# EAGLE board Dash LEDs r3 (EAGLE 8.4.1)
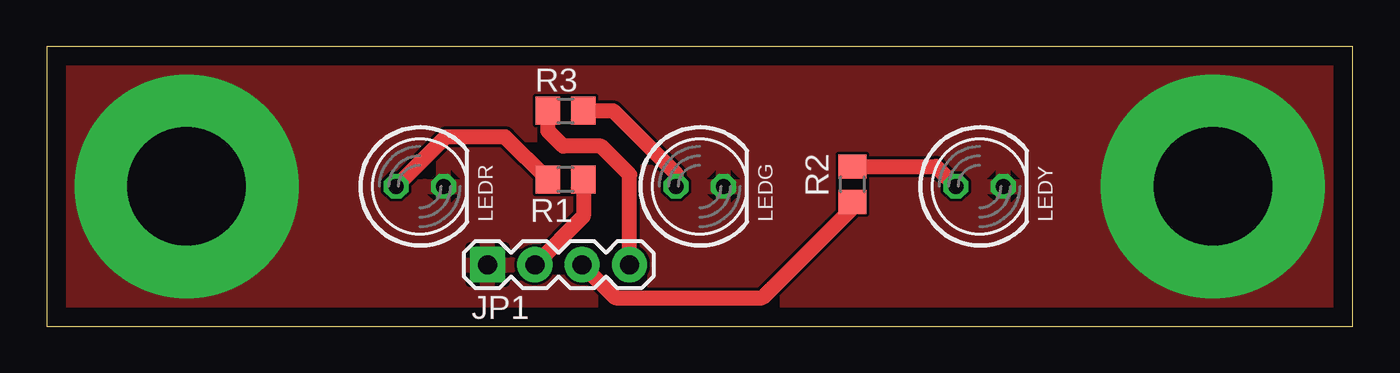
[diagram p0: board, top side]
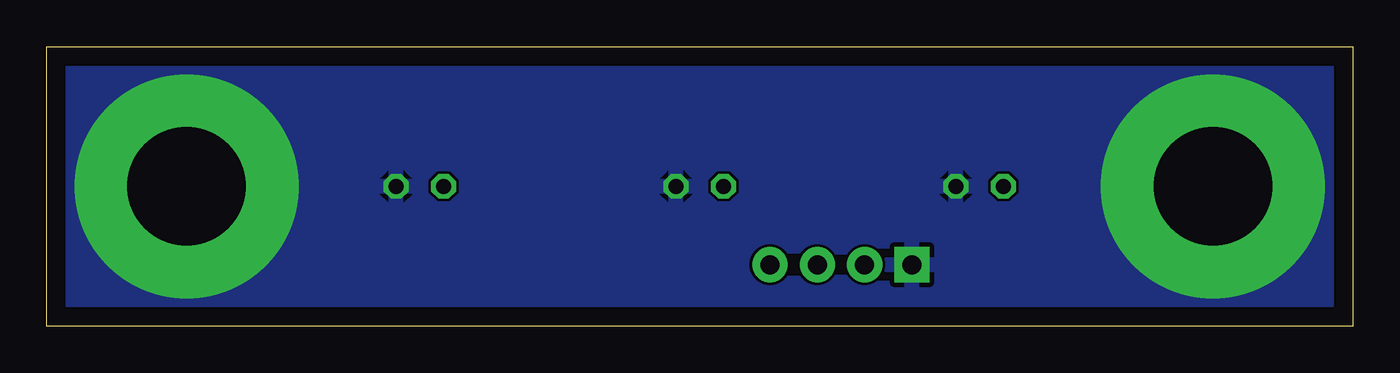
[diagram p1: board, bottom side, seen from below]

Size 70 x 15 mm. Coordinates in mm from the lower left corner, seen from the top.
Outline: 0,0 70,0 70,15 0,15 0,0
Copper layers (1*16): Top 0.035mm / dielectric 1.5mm / Bottom 0.035mm
Design rules "default": minimum track width 6mil, minimum drill 0.35mm, track to track 6mil, track to pad 6mil, pad to pad 6mil, via to via 6mil, smd to smd 6mil, copper to edge 40mil, drill to drill 6mil, minimum pad ring 10mil, minimum via ring 8mil, stop-mask expansion 4mil, vias tented up to drill 0mil, thermal gap 10mil

## Footprints (pad centres in the part's own frame; a part is rotated, then mirrored left to right if it is on the bottom)
1X04 = drill 1.016 pad 1.88 square: 1 0,0 | drill 1.016 pad 1.88: 2 2.54,0; 3 5.08,0; 4 7.62,0
LED5MM = drill 0.813 octagon: A -1.27,0; K 1.27,0
R0805 = smd 1.3 x 1.5: 1 -0.95,0; 2 0.95,0

## Placement (x,y rotation side)
JP1  [1X04]  23.62,3.3 0 top
LEDG  [LED5MM]  35,7.5 0 top
LEDR  [LED5MM]  20,7.5 0 top
LEDY  [LED5MM]  50,7.5 0 top
R1  499R  [R0805]  27.81,7.87 180 top
R2  499R  [R0805]  43.18,7.62 90 top
R3  499R  [R0805]  27.81,11.56 0 top

## Library data of the parts
JP1 = SparkFun-Connectors
LEDG LEDR LEDY = led
R1-R3 = resistor

## Nets
DRV1: JP1.2 R1.1
DRV2: JP1.3 R2.1
DRV3: JP1.4 R3.1
GND: JP1.1 LEDG.K LEDR.K LEDY.K
N$1: LEDR.A R1.2
N$2: LEDY.A R2.2
N$3: LEDG.A R3.2

## Tracks (layer width: path | path; a pad name or v marks a point on that pad's centre or on a via)
DRV1
  Top 0.813: R1.1 28.76,5.9 JP1.2
DRV2
  Top 0.813: JP1.3 30.48,1.52 38.35,1.52 43.18,6.35 R2.1
DRV3
  Top 0.813: JP1.4 31.24,8.13 29.72,9.65 27.69,9.65 26.86,10.47 R3.1
GND  (via drill 6.35 pad 12)
  other vias: 7.5,7.5 62.5,7.5
  pour Bottom: -1.27,16.51 71.12,16.51 71.12,12.7 71.12,-1.27 29.21,-1.27 -1.27,-1.27
  pour Top: -1.27,11.43 -1.27,16.51 2.54,16.51 71.12,16.51 71.12,7.62 71.12,-1.27 1.27,-1.27 -1.27,-1.27
N$1
  Top 0.813: R1.2 24.58,10.16 21.39,10.16 LEDR.A
N$2
  Top 0.813: R2.2 47.66,8.57 LEDY.A
N$3
  Top 0.813: R3.2 30.35,11.56 33.73,8.18 LEDG.A